# Altium PCB db.PcbDoc
Units mil, origin at the board's own origin, x right, y up, seen from the top; angles counter-clockwise.
Board outline 8515 x 5415 mil, 2 copper layers (Top Layer, Bottom Layer); 169 components, 109 nets, 459 pads, 410 vias.
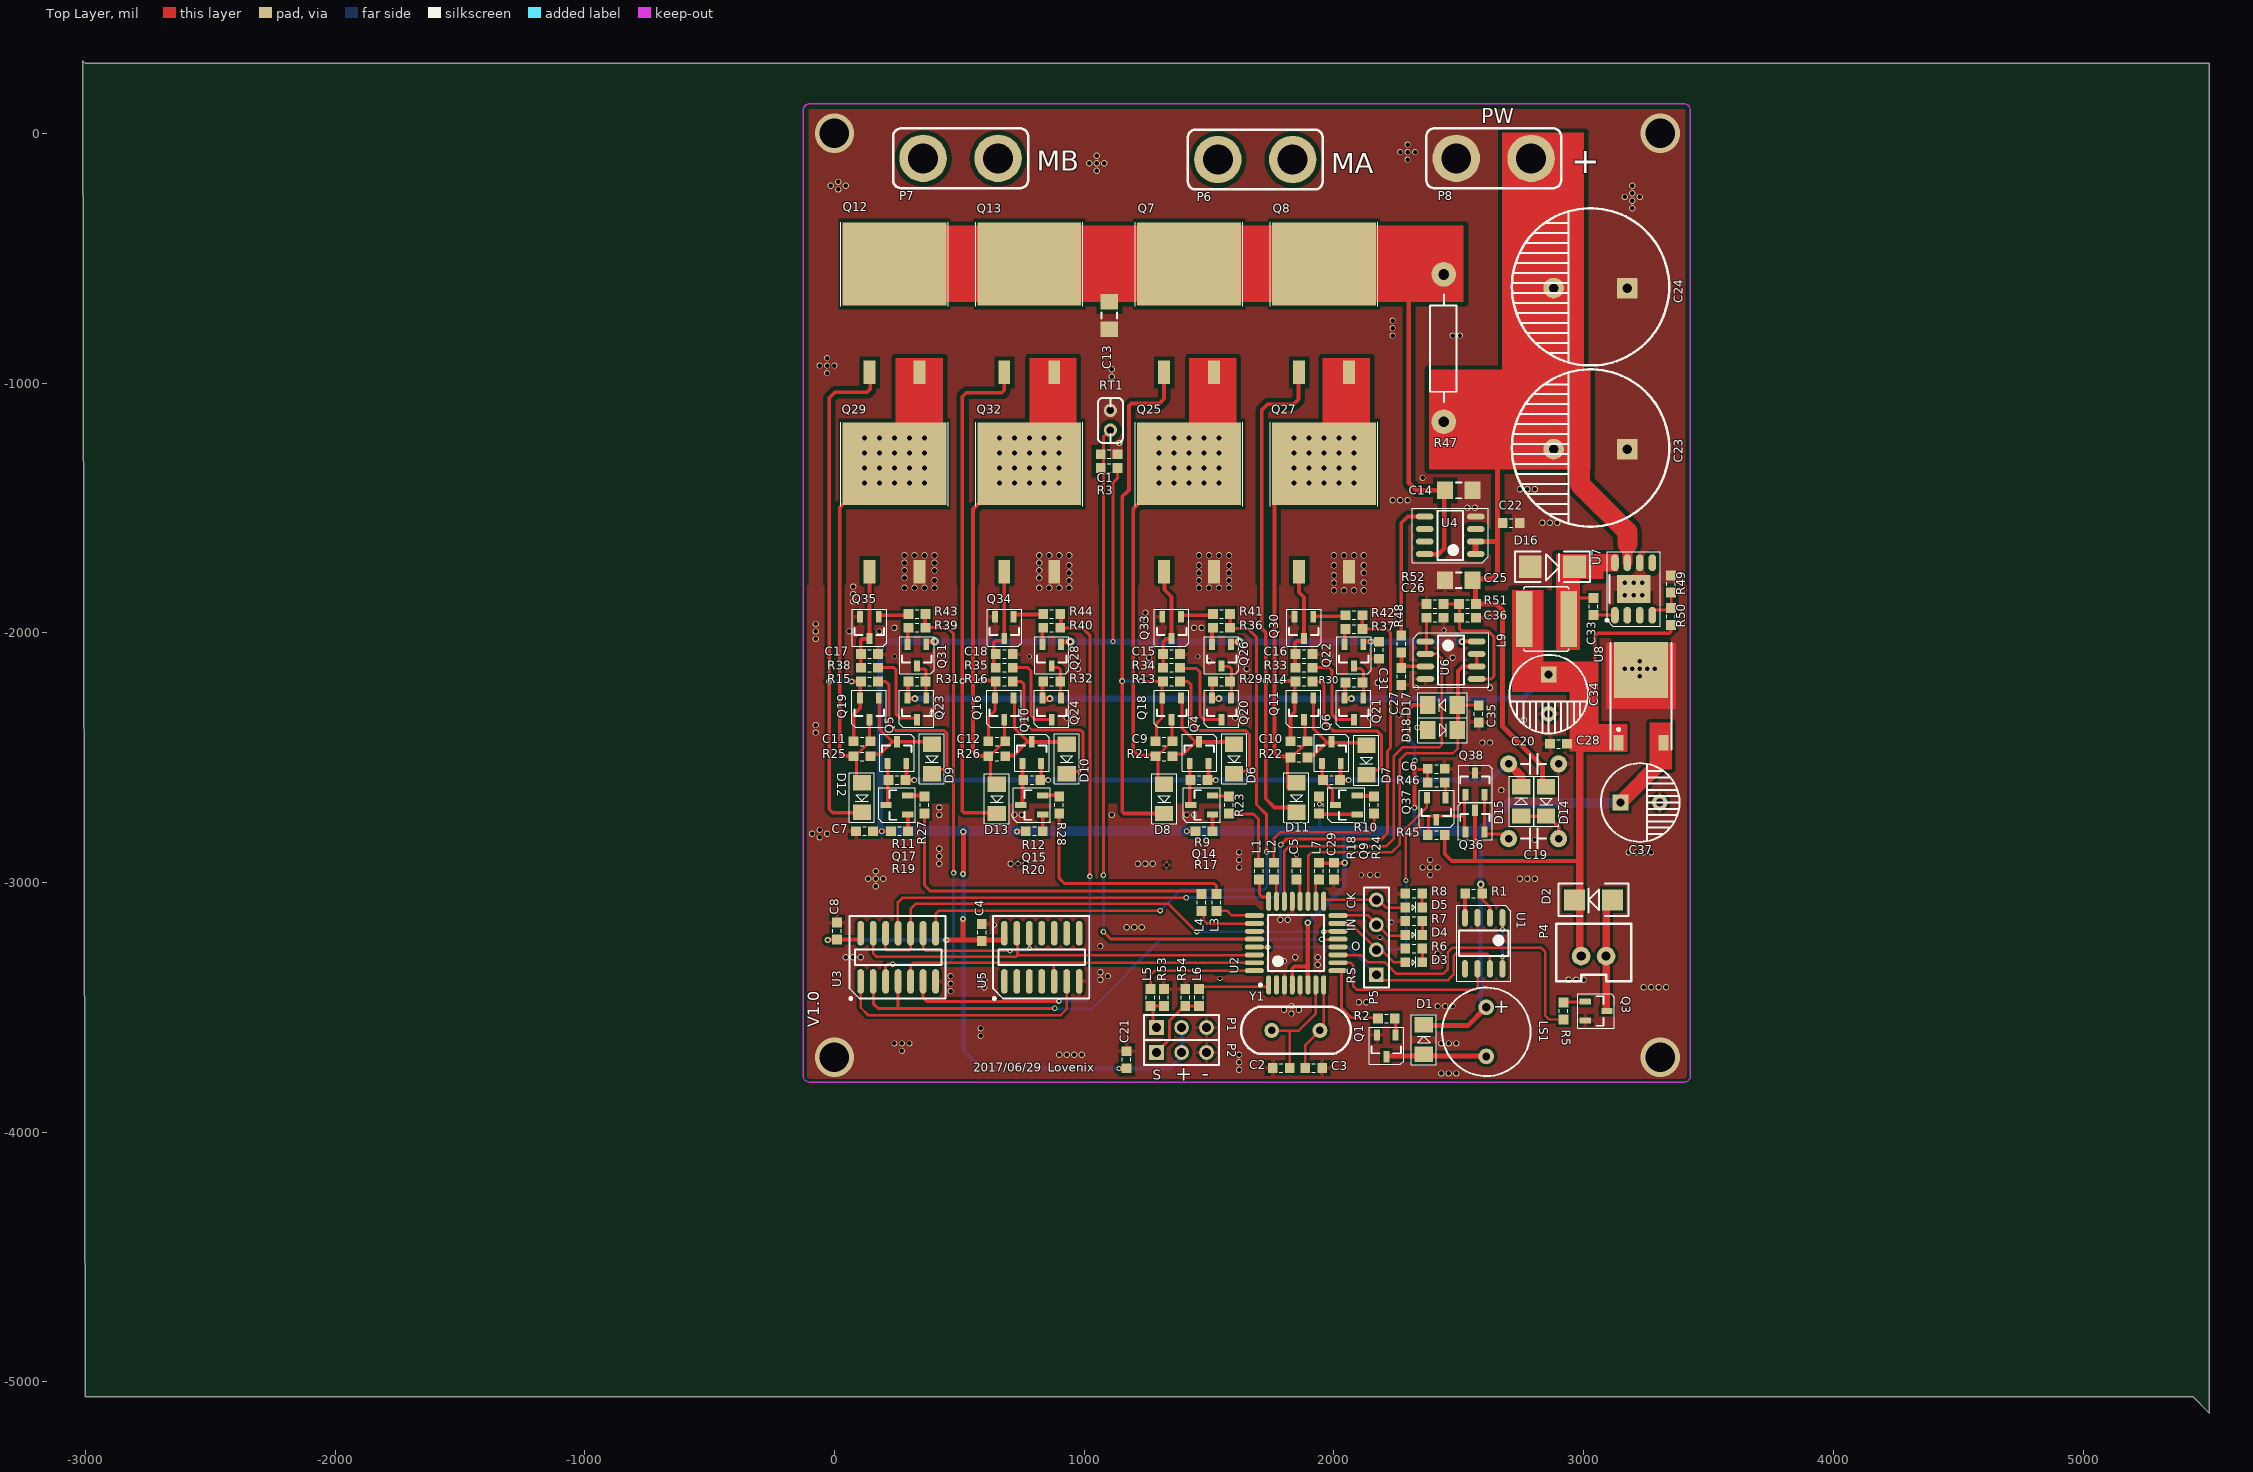
[diagram p0: Top Layer view]
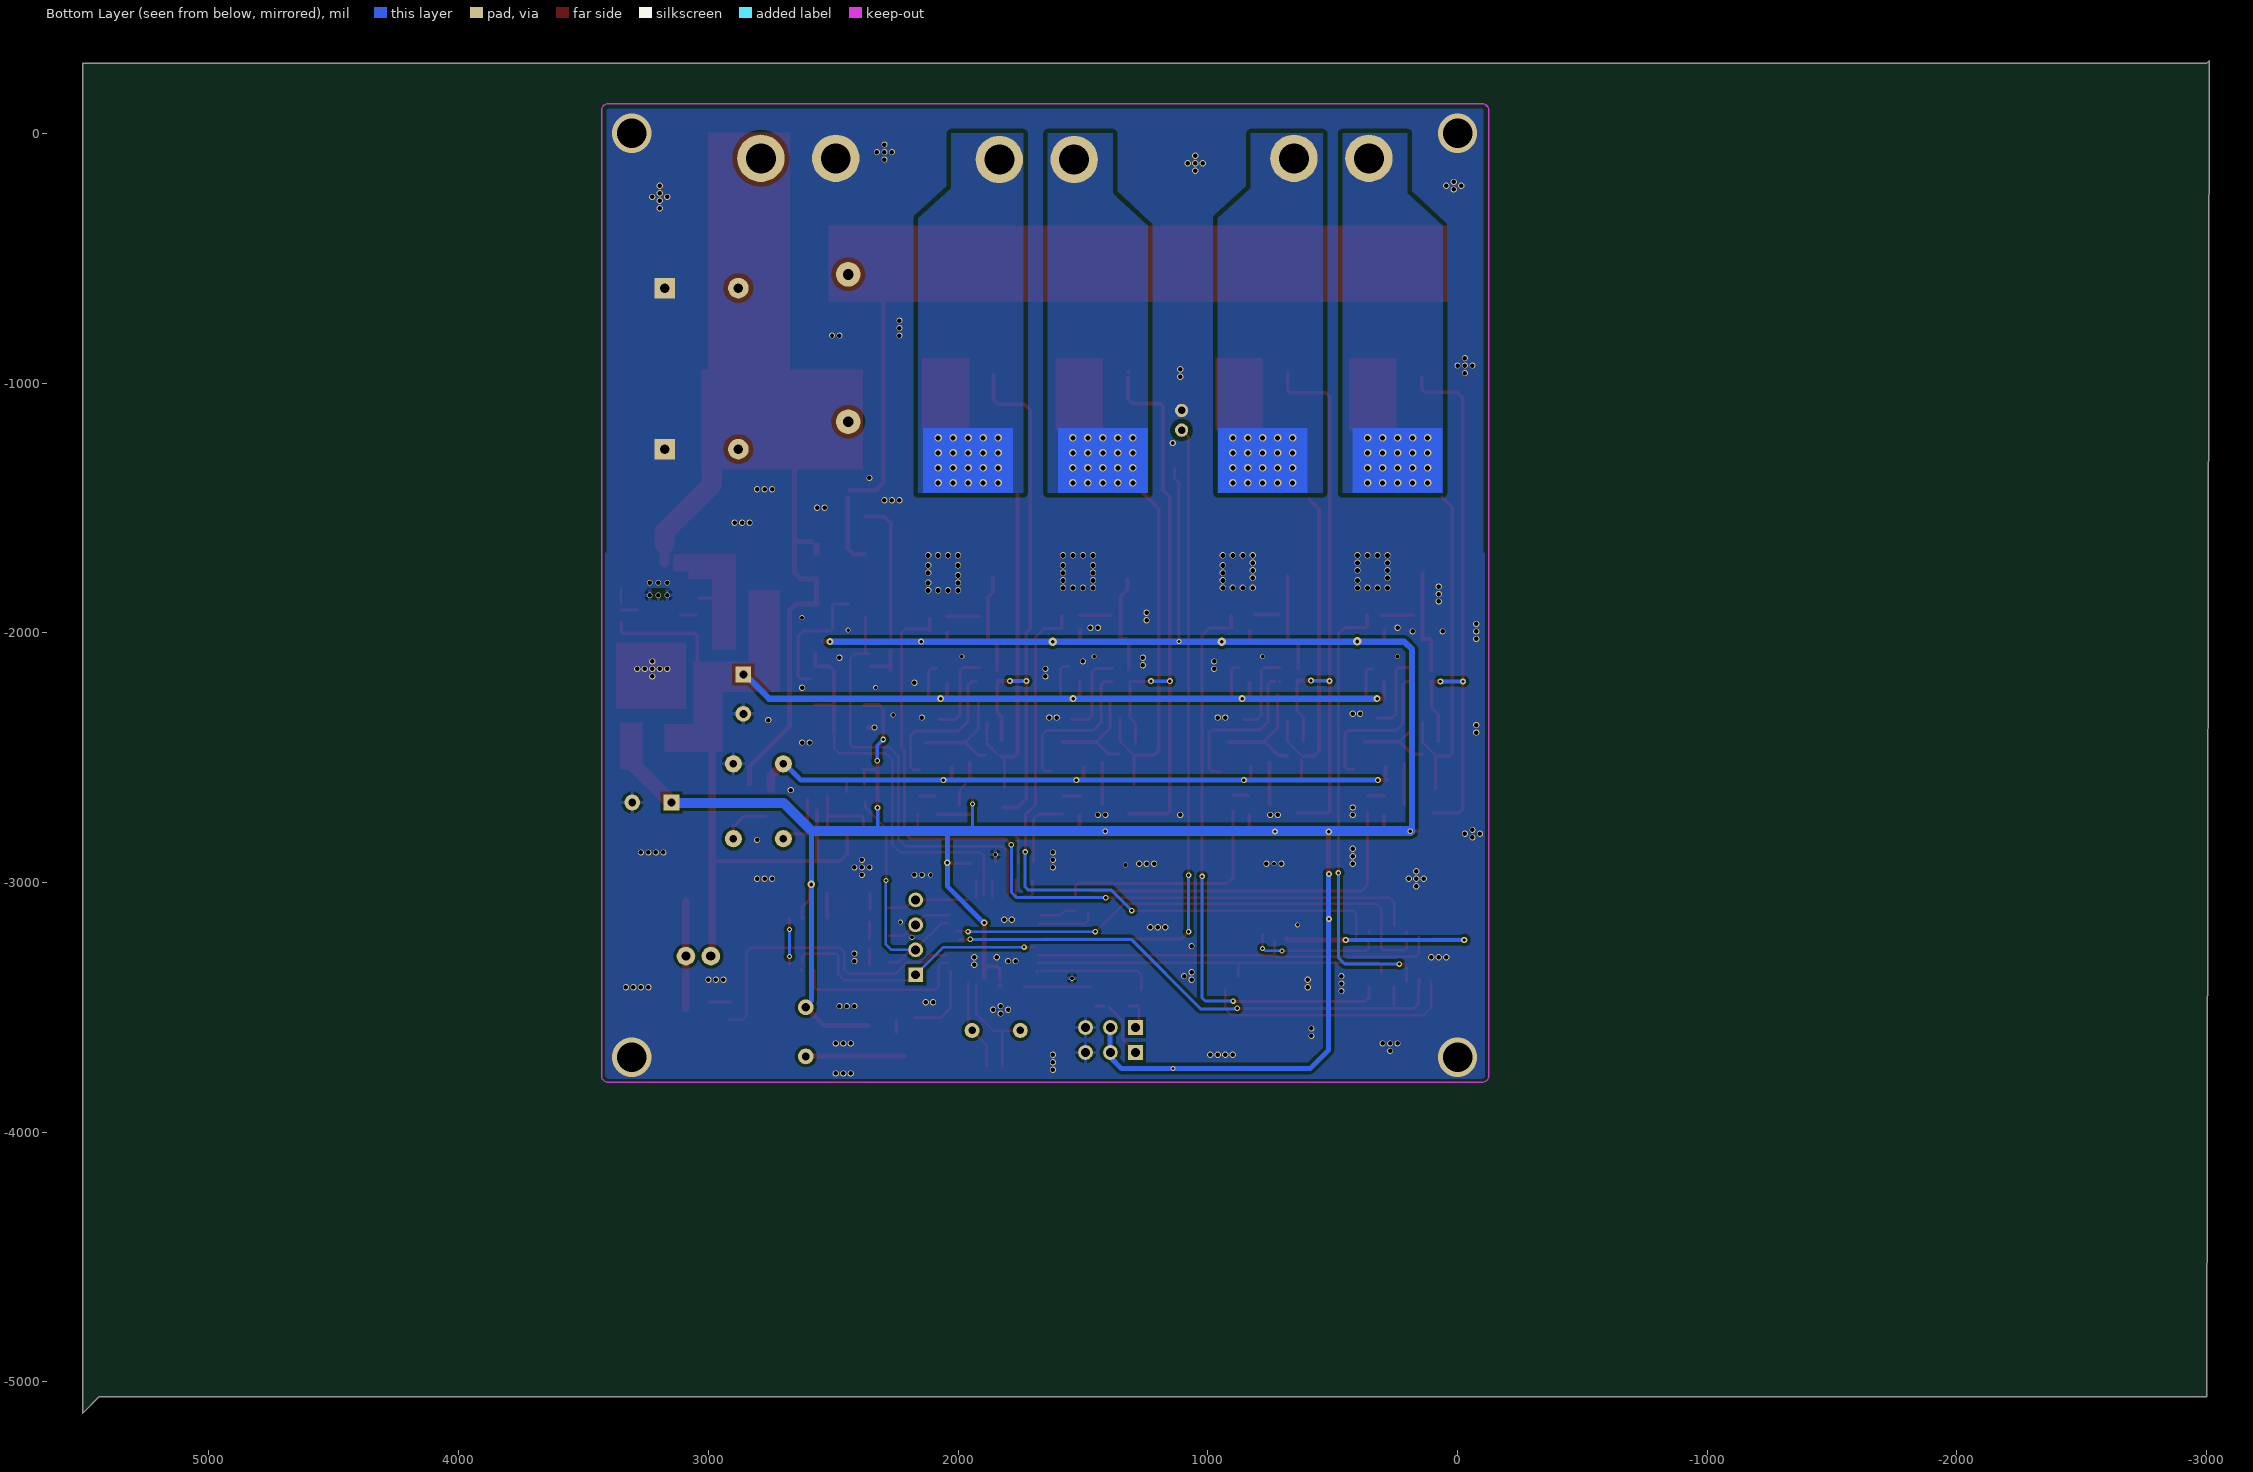
[diagram p1: Bottom Layer view, seen from below]

## Layer stack, top to bottom
Top Layer: signal copper 1.4
Dielectric: dielectric 12.6, FR-4, Dk 4.8
Bottom Layer: signal copper 1.4

## Board outline
-3010,290 -3000,280 5505,280 5505,-5125 5440,-5060 -3000,-5060

## Design rules (kind name [scope] priority, off if disabled: settings)
Clearance Clearance_1 [InPolygon] p1: gap=12
Clearance [All] p2 off: gap=12
ComponentClearance [All] p1 off: gap=10 collisioncheckmode=3 verticalgap=10
HoleSize [All] p1: absolutevalues=TRUE maxlimit=200 minlimit=1 maxpercent=80.000 minpercent=20.000
PolygonConnect [All] p1: connectstyle=Relief reliefconductorwidth=15 reliefentries=4 polygonreliefangle="90 Angle"
RoutingVias [All] p1: holewidth=18 width=29 viastyle="Through Hole" minholewidth=12 minwidth=20 maxholewidth=150 maxwidth=250
SolderMaskExpansion [All] p1: expansion=4
TestPointUsage [All] p1: valid=0 allowmultiple=FALSE
Testpoint [All] p1: side=15 testpointundercomponent=TRUE minsize=40 maxsize=100 preferedsize=60 minholesize=0 maxholesize=40 preferedholesize=32 testpointgrid=1 style=1023 order=0-112345678
Width [All] p1: maxlimit=300 minlimit=10 preferedwidth=10 toplayer_prefwidth=12 bottomlayer_prefwidth=12 minimp=50.000000 maximp=50.000000 favimp=50.000000
17 further rules are at their usual default settings.

## Classes and differential pairs
component class power: C28 C29 C30 C31 C32 C33 C34 C35 C36 C37 D16 D17 D18 D19 D24 D25 L9 L14 L18 P8 R49 R50 R51 R52 R93 R94 U7 U8 U13
component class core: C1 C2 C3 C4 C5 C6 C7 C8 D1 D2 D3 D4 D5 L1 L2 L3 L4 L5 L6 L7 LS1 P1 P2 P4 P5 Q1 Q3 R1 R2 R3 R5 R6 R7 R8 R53 R54 RT1 U1 U2 U3 U5 Y1
component class drive: C9 C10 C11 C12 C13 C14 C15 C16 C17 C18 C19 C20 C21 C22 C23 C24 C25 C26 C27 D6 D7 D8 D9 D10 D11 D12 D13 D14 D15 P6 P7 Q4 Q5 Q6 Q7 Q8 Q9 Q10 Q11 Q12 Q13 Q14 Q15 Q16 Q17 Q18 Q19 Q20 Q21 Q22 Q23 Q24 Q25 Q26 Q27 Q28 Q29 Q30 Q31 Q32 Q33 Q34 Q35 Q36 Q37 Q38 R9 R10 R11 R12 R13 R14 R15 R16 R17 R18 R19 R20 R21 R22 R23 R24 R25 R26 R27 R28 R29 R30 R31 R32 R33 R34 R35 R36 R37 R38 R39 R40 R41 R42 R43 R44 R45 R46 R47 R48 U4 U6

## Components (designator, comment, footprint, x,y, rotation, side; value= is the part's Value field where it differs from the comment)
C1 "Cap" 0603 1100,-1285 r180 top
C2 "Cap" 0603 1789,-3743 r180 top
C3 "Cap" 0603 1919,-3743 r0 top
C4 "Cap" 0603 590,-3200 r90 top
C5 "Cap" 0603 1850,-2955 r90 top
C6 "Cap" 0603 2410,-2545 r180 top
C7 "Cap" 0603 120,-2795 r0 top
C8 "Cap" 0603 10,-3195 r270 top
C9 "Cap" 0603 1320,-2435 r0 top
C10 "Cap" 0603 1860,-2435 r0 top
C11 "Cap" 0603 110,-2435 r0 top
C12 "Cap" 0603 650,-2435 r0 top
C13 "Cap" 3216[1206] 1100,-730 r270 top
C14 "Cap" 3216[1206] 2500,-1430 r0 top
C15 "Cap" 0603 1350,-2085 r0 top
C16 "Cap" 0603 1880,-2085 r0 top
C17 "Cap" 0603 140,-2085 r0 top
C18 "Cap" 0603 680,-2085 r0 top
C19 "Cap" C-5.08 2900,-2825 r180 top
C20 "Cap" C-5.08 2900,-2525 r180 top
C21 "Cap" 0603 1170,-3710 r270 top
C22 "Cap" 0603 2710,-1560 r180 top
C23 "Cap Pol1" C16-7.5 2880,-1265 r0 top
C24 "Cap Pol1" C16-7.5 2880,-620 r0 top
C25 "Cap" 3216[1206] 2500,-1790 r180 top
C26 "Cap" 0603 2405,-1940 r180 top
C27 "Cap" 0603 2270,-2175 r90 top
C28 "Cap" 0603 2900,-2445 r180 top
C29 "Cap" 0603 2000,-2955 r270 top
C31 "Cap" 0603 2180,-2070 r270 top
C33 "Cap" 0603 3040,-1895 r270 top
C34 "Cap Pol1" C8x4 2860,-2325 r90 top
C35 "Cap" 0603 2580,-2325 r90 top
C36 "Cap" 0603 2535,-1940 r0 top
C37 "Cap Pol1" C8x4 3305,-2680 r180 top
D1 "4148" LL34 2360,-3630 r90 top
D2 "Diode" SMA 3040,-3070 r180 top
D3 "FAN" 0603-LED 2320,-3320 r0 top
D4 "SIG" 0603-LED 2320,-3210 r0 top
D5 "FAT" 0603-LED 2320,-3100 r0 top
D6 "1N4148" LL34 1600,-2505 r270 top
D7 "1N4148" LL34 2130,-2510 r270 top
D8 "1N4744" LL34 1320,-2665 r270 top
D9 "1N4148" LL34 390,-2505 r270 top
D10 "1N4148" LL34 930,-2505 r270 top
D11 "1N4744" LL34 1850,-2660 r270 top
D12 "1N4744" LL34 110,-2660 r270 top
D13 "1N4744" LL34 650,-2665 r270 top
D14 "Diode" LL34 2850,-2675 r270 top
D15 "Diode" LL34 2750,-2675 r90 top
D16 "SS54" SMB 2875,-1735 r0 top
D17 "4148" LL34 2435,-2290 r180 top
D18 "4148" LL34 2435,-2390 r0 top
L1 "Inductor" 0603 1700,-2955 r90 top
L2 "Inductor" 0603 1760,-2955 r90 top
L3 "Inductor" 0603 1530,-3080 r90 top
L4 "Inductor" 0603 1470,-3080 r90 top
L5 "Inductor" 0603 1265,-3461 r90 top
L6 "Inductor" 0603 1460,-3461 r90 top
L7 "Inductor" 0603 1940,-2955 r90 top
L9 "Inductor" L-6045 2940,-1945 r180 top
LS1 "Bell" BEEP-9x5.5 2610,-3500 r270 top
P1 "S1" HDR1X3 1290,-3581 r0 top
P2 "S2" HDR1X3 1290,-3681 r0 top
P4 "FAN" XH2.54-2P 2990,-3295 r0 top
P5 "ISP" HDR1X4 2170,-3370 r90 top
P6 "L-MOT" MG7.62-2P 1835,-105 r180 top
P7 "L-MOT" MG7.62-2P 655,-100 r180 top
P8 "POW" MG7.62-2P 2790,-100 r180 top
Q1 "NPN" SOT-23-NPN 2210,-3655 r180 top
Q3 "NPN" SOT-23-NPN 3050,-3515 r270 top
Q4 "2N5401" SOT-23-PNP 1460,-2480 r0 top
Q5 "2N5401" SOT-23-PNP 250,-2480 r0 top
Q6 "2N5401" SOT-23-PNP 1990,-2480 r0 top
Q7 "IRF3205S" D2PAK-263 1420,-740 r0 top
Q8 "IRF3205S" D2PAK-263 1960,-740 r0 top
Q9 "2N5551" SOT-23-NPN 2050,-2690 r90 top
Q10 "2N5401" SOT-23-PNP 790,-2480 r0 top
Q11 "2N5401" SOT-23-PNP 1880,-2305 r180 top
Q12 "IRF3205S" D2PAK-263 240,-740 r0 top
Q13 "IRF3205S" D2PAK-263 780,-740 r0 top
Q14 "2N5551" SOT-23-NPN 1470,-2690 r90 top
Q15 "2N5551" SOT-23-NPN 790,-2690 r90 top
Q16 "2N5401" SOT-23-PNP 680,-2305 r180 top
Q17 "2N5551" SOT-23-NPN 250,-2690 r90 top
Q18 "2N5401" SOT-23-PNP 1350,-2305 r180 top
Q19 "2N5401" SOT-23-PNP 140,-2305 r180 top
Q20 "2N5401" SOT-23-PNP 1550,-2305 r180 top
Q21 "2N5401" SOT-23-PNP 2080,-2305 r180 top
Q22 "2N5551" SOT-23-NPN 2080,-2090 r180 top
Q23 "2N5401" SOT-23-PNP 330,-2305 r180 top
Q24 "2N5401" SOT-23-PNP 870,-2305 r180 top
Q25 "IRF3205S" D2PAK-263 1420,-1540 r0 top
Q26 "2N5551" SOT-23-NPN 1550,-2090 r180 top
Q27 "IRF3205S" D2PAK-263 1960,-1540 r0 top
Q28 "2N5551" SOT-23-NPN 870,-2090 r180 top
Q29 "IRF3205S" D2PAK-263 240,-1540 r0 top
Q30 "2N5551" SOT-23-NPN 1880,-1980 r180 top
Q31 "2N5551" SOT-23-NPN 330,-2090 r180 top
Q32 "IRF3205S" D2PAK-263 780,-1540 r0 top
Q33 "2N5551" SOT-23-NPN 1350,-1980 r180 top
Q34 "2N5551" SOT-23-NPN 680,-1980 r180 top
Q35 "2N5551" SOT-23-NPN 140,-1980 r180 top
Q36 "NPN" SOT-23-NPN 2565,-2755 r0 top
Q37 "NPN" SOT-23-NPN 2410,-2705 r180 top
Q38 "PNP" SOT-23-PNP 2565,-2605 r0 top
R1 "Res1" 0603 2560,-3045 r0 top
R2 "Res1" 0603 2210,-3545 r180 top
R3 "Res1" 0603 1100,-1340 r0 top
R5 "Res1" 0603 2920,-3515 r90 top
R6 "Res1" 0603 2320,-3265 r180 top
R7 "Res1" 0603 2320,-3155 r180 top
R8 "Res1" 0603 2320,-3045 r180 top
R9 "Res1" 0603 1460,-2590 r180 top
R10 "Res1" 0603 1990,-2590 r180 top
R11 "Res1" 0603 250,-2590 r180 top
R12 "Res1" 0603 790,-2590 r180 top
R13 "Res1" 0603 1350,-2195 r180 top
R14 "Res1" 0603 1880,-2195 r0 top
R15 "Res1" 0603 140,-2195 r180 top
R16 "Res1" 0603 680,-2195 r0 top
R17 "Res1" 0603 1480,-2795 r180 top
R18 "Res1" 0603 1940,-2690 r90 top
R19 "Res1" 0603 260,-2795 r180 top
R20 "Res1" 0603 800,-2795 r180 top
R21 "Res1" 0603 1320,-2495 r0 top
R22 "Res1" 0603 1860,-2500 r0 top
R23 "Res1" 0603 1580,-2690 r90 top
R24 "Res1" 0603 2160,-2690 r270 top
R25 "Res1" 0603 110,-2495 r0 top
R26 "Res1" 0603 650,-2495 r0 top
R27 "Res1" 0603 360,-2690 r90 top
R28 "Res1" 0603 900,-2690 r270 top
R29 "Res1" 0603 1550,-2195 r0 top
R30 "Res1" 0603 2080,-2200 r0 top
R31 "Res1" 0603 330,-2195 r0 top
R32 "Res1" 0603 870,-2195 r0 top
R33 "Res1" 0603 1880,-2140 r0 top
R34 "Res1" 0603 1350,-2140 r180 top
R35 "Res1" 0603 680,-2140 r0 top
R36 "Res1" 0603 1550,-1980 r180 top
R37 "Res1" 0603 2080,-1985 r0 top
R38 "Res1" 0603 140,-2140 r180 top
R39 "Res1" 0603 330,-1980 r180 top
R40 "Res1" 0603 870,-1980 r0 top
R41 "Res1" 0603 1550,-1925 r0 top
R42 "Res1" 0603 2080,-1930 r180 top
R43 "Res1" 0603 330,-1925 r0 top
R44 "Res1" 0603 870,-1925 r180 top
R45 "Res1" 0603 2410,-2810 r0 top
R46 "Res1" 0603 2410,-2600 r180 top
R47 "" R15-1mm 2440,-660 r270 top
R48 "Res1" 0603 2270,-2045 r90 top
R49 "Res1" 0603 3350,-1805 r270 top
R50 "Res1" 0603 3350,-1935 r90 top
R51 "Res1" 0603 2535,-1885 r0 top
R52 "Res1" 0603 2405,-1885 r0 top
R53 "Res1" 0603 1320,-3461 r90 top
R54 "Res1" 0603 1405,-3461 r90 top
RT1 "Res1" RT-2.0 1105,-1110 r270 top
U1 "MAX706RCSA" SOIC8 2600,-3245 r270 top
U2 "ATmega8-16AC" 32A_M 1849,-3243 r90 top
U3 "IC" 751A 255,-3300 r90 top
U4 "MAX4080" SOIC8 2465,-1610 r180 top
U5 "IC" 751A 830,-3300 r90 top
U6 "LM358D" SOIC8 2470,-2110 r0 top
U7 "LM22676-5.0" SOP8-POW 3200,-1825 r90 top
U8 "MC78M05" 369A-13 3230,-2295 r0 top
Y1 "XTAL" 49SD 1944,-3593 r180 top

## Footprints (in the part's own frame and the unit in brackets; to place one, negate y for a bottom-side part, rotate by r counter-clockwise, add the part's x,y. Pads: shape width x height; smd on the part's side, far side on the other; paste and mask are expansions set on the pad)
32A_M [mm] "32-Pin Thin Quad Flat Pack 0.8 mm Pitch, IPC Low Density"
  oval 1.95x0.508 smd: 1(-4.25,2.8) 2(-4.25,2) 3(-4.25,1.2) 4(-4.25,0.4) 5(-4.25,-0.4) 6(-4.25,-1.2) 7(-4.25,-2) 8(-4.25,-2.8) 17(4.25,-2.8) 18(4.25,-2) 19(4.25,-1.2) 20(4.25,-0.4) 21(4.25,0.4) 22(4.25,1.2) 23(4.25,2) 24(4.25,2.8)
  oval 0.508x1.95 smd: 9(-2.8,-4.25) 10(-2,-4.25) 11(-1.2,-4.25) 12(-0.4,-4.25) 13(0.4,-4.25) 14(1.2,-4.25) 15(2,-4.25) 16(2.8,-4.25) 25(2.8,4.25) 26(2,4.25) 27(1.2,4.25) 28(0.4,4.25) 29(-0.4,4.25) 30(-1.2,4.25) 31(-2,4.25) 32(-2.8,4.25)
  silkscreen extent -4.37,-2.85 2.85,3.77, body extent -3.5,-3.5 3.5,3.5, height 1.2
49SD [mil]
  round 60 hole 30: 1(0,0) 2(193,0)
  silkscreen extent -124,-95 315,94
369A-13 [mm] "D-PAK/TO-252-AA; 3 Leads (1 Cropped); Body 10.3 (inc. leads) x 6.7 mm (LxW max)"
  rect 1x1.6 smd: 1(-2.285,-3.7) 3(2.285,-3.7)
  rect 5.5x5.7 smd: 4(0,3.7)
  silkscreen extent -3.09,-4.4 3.09,6.45
0603 [mm]
  rect 1x1 smd: 1(-0.864,0) 2(0.864,0)
  silkscreen extent -0.18,-0.43 0.18,0.43
0603-LED [mm]
  rect 1x1 smd: 1(-0.864,0) 2(0.864,0)
  silkscreen extent -0.18,-0.51 0.18,0.56
751A [mm]
  oval 2.5x0.7 smd: 1(-2.45,3.81) 2(-2.45,2.54) 3(-2.45,1.27) 4(-2.45,0) 5(-2.45,-1.27) 6(-2.45,-2.54) 7(-2.45,-3.81) 8(2.45,-3.81) 9(2.45,-2.54) 10(2.45,-1.27) 11(2.45,0) 12(2.45,1.27) 13(2.45,2.54) 14(2.45,3.81)
  silkscreen extent -4.31,-4.83 4.19,4.95, body extent -2,-4.38 2,4.38, height 1.75
3216[1206] [mm] "Chip Resistor; Body 3.2 x 1.6 mm (LxW typ)"
  rect 1.6x1.8 smd: 1(-1.4,0) 2(1.4,0)
  silkscreen extent -0.3,-0.8 0.3,0.8
BEEP-9x5.5 [mm]
  round 1.6 hole 0.8: 1(5,0)
  round 1.6 hole 0.9: 2(0,0)
  silkscreen extent -2,-4.5 7,4.5
C8x4 [mm]
  round 1.6 hole 0.8: 1(0,0)
  rect 1.6x1.6 hole 0.8: 2(4,0)
  silkscreen extent -2,-4 6,4
C16-7.5 [mm]
  round 2.1 hole 0.95: 1(0,0)
  rect 2.1x2.1 hole 0.95: 2(7.5,0)
  silkscreen extent -4.25,-7.87 11.75,8.12
C-5.08 [mm]
  round 1.75 hole 0.75: 1(0,0) 2(5.08,0)
  silkscreen extent 1.27,-1.02 3.81,1.02
D2PAK-263 [mm]
  rect 1.2x2.4 smd: 1(-2.54,-5.5) 3(2.54,-5.5)
  rect 10.55x8.4 smd: 2(0,5.5)
  silkscreen extent -5.46,1.19 5.46,9.73
HDR1X3 [mm] "Connector; Header; 3 Position"
  rect 1.5x1.5 hole 0.9: 1(0,0)
  round 1.5 hole 0.9: 2(2.54,0) 3(5.08,0)
  silkscreen extent -1.27,-1.27 6.35,1.27
HDR1X4 [mm] "Connector; Header; 4 Position"
  rect 1.5x1.5 hole 0.9: 1(0,0)
  round 1.5 hole 0.9: 2(2.54,0) 3(5.08,0) 4(7.62,0)
  silkscreen extent -1.27,-1.27 8.89,1.27
L-6045 [mm]
  rect 1.7x5.7 smd: 1(0,0) 2(4.5,0)
  silkscreen extent 0,-3.3 4.57,3.3
LL34 [mm] "MELF Diode, 2-Leads, Body 3.3x1.6mm, IPC Medium Density"
  rect 1.575x1.85 smd: 1(-1.5,0) 2(1.5,0)
  silkscreen extent -2.54,-1.27 2.54,1.27, body extent -1.65,-0.82 1.65,0.82, height 1.65
MG7.62-2P [mil]
  round 190 hole 120: 1(0,0) 2(300,0)
  silkscreen extent -120,-120 420,120
R15-1mm [mm]
  round 2.5 hole 1.1: 1(-2.413,0) 2(12.573,0)
  silkscreen extent -0.38,-1.4 10.55,1.3
RT-2.0 [mm]
  round 1.35 hole 0.762: 1(0,0) 2(2,0)
  silkscreen extent -1.27,-1.27 3.3,1.27
SMA [mm] "Molded Diode, 2-Leads, Body 4.3x2.7mm, IPC Medium Density"
  rect 2.15x2.15 smd: 1(-1.93,0) 2(1.93,0)
  silkscreen extent -3.56,-1.65 3.56,1.65, body extent -2.28,-1.42 2.29,1.42, height 2.95
SMB [mm]
  rect 2.3x2.3 smd: 1(-2.25,-0.025) 2(2.25,-0.025)
  silkscreen extent -3.8,-1.58 3.81,1.52
SOIC8 [mm]
  oval 1.8x0.6 smd: 1(-2.625,1.905) 2(-2.625,0.635) 3(-2.625,-0.635) 4(-2.625,-1.905) 5(2.575,-1.905) 6(2.575,-0.635) 7(2.575,0.635) 8(2.575,1.905)
  silkscreen extent -3.89,-2.74 3.84,2.77, body extent -2.03,-2.5 1.97,2.5, height 1.76
SOP8-POW [mm]
  oval 1.7x0.8 smd: 1(-2.675,1.905) 2(-2.675,0.635) 3(-2.675,-0.635) 4(-2.675,-1.905) 5(2.675,-1.905) 6(2.675,-0.635) 7(2.675,0.635) 8(2.675,1.905)
  rect 2.8x3.4 smd: 6(0,0)
  silkscreen extent -3.78,-2.7 3.77,2.82
SOT-23-NPN [mm]
  rect 0.6x1.143 smd: 1(0.95,-1.108) 2(-0.95,-1.108) 3(0,1.108)
  silkscreen extent -1.75,-1.89 1.75,1.87, body extent -1.5,-0.66 1.5,0.74, height 1.1
SOT-23-PNP [mm]
  rect 0.6x1.143 smd: 1(0.95,-1.108) 2(-0.95,-1.108) 3(0,1.108)
  silkscreen extent -1.73,-1.89 1.78,1.87, body extent -1.5,-0.66 1.5,0.74, height 1.1
XH2.54-2P [mm]
  round 1.9 hole 0.95 paste+0: 1(0,0)
  round 1.9 hole 0.95: 2(2.54,0)
  silkscreen extent -2.54,-2.54 5.08,3.3

## Part data
C1 C2 C3 C4 C5 C6 C7 C8 C9 C10 C11 C12 C13 C14 C15 C16 C17 C18 C19 C20 C21 C22 C25 C26 C27 C28 C29 C31 C33 C35 C36: "Capacitor"
C23 C24 C34 C37: "Polarized Capacitor (Radial)"
D1 D2: library part "Diode 1N4007", "1 Amp General Purpose Rectifier"
D3 D4 D5: library part LED2, "Typical RED, GREEN, YELLOW, AMBER GaAs LED"
D6 D7 D9 D10: library part "Diode 1N4148", "High Conductance Fast Diode"
D8 D11 D12 D13: library part "D Zener", "Zener Diode"
D14 D15 D16 D17 D18: library part "Diode 1N5408", "3 Amp Medium Power Silicon Rectifier Diode"
LS1: "Electrical Bell"
P1 P2: library part "Header 3", "Header, 3-Pin"
P4 P6 P7 P8: library part "Header 2", "Header, 2-Pin"
P5: library part "Header 5", "Header, 5-Pin"
Q1 Q3 Q36 Q37: library part 2N5551, "NPN General Purpose Amplifier"
Q4 Q5 Q6 Q10 Q11 Q16 Q18 Q19 Q20 Q21 Q23 Q24: "PNP General Purpose Amplifier"
Q7 Q8 Q12 Q13 Q25 Q27 Q29 Q32: "HEXFET Power MOSFET"
Q9 Q14 Q15 Q17 Q22 Q26 Q28 Q30 Q31 Q33 Q34 Q35: "NPN General Purpose Amplifier"
Q38: library part 2N5401, "PNP General Purpose Amplifier"
R1 R2 R3 R5 R6 R7 R8 R9 R10 R11 R12 R13 R14 R15 R16 R17 R18 R19 R20 R21 R22 R23 R24 R25 R26 R27 R28 R29 R30 R31 R32 R33 R34 R35 R36 R37 R38 R39 R40 R41 R42 R43 R44 R45 R46 R48 R49 R50 R51 R52 R53 R54 RT1: "Resistor"
R47: library part Res1, "Resistor"
U1: "+3V Voltage Monitoring, Low-Cost, µP Supervisory Circuit"
U2: "8-Bit AVR Microcontroller with 8K Bytes of In-System Programmable Flash Memory"
U3: library part MC74HC08AD, "Quad 2-Input AND Gate"
U5: library part MC74HC04AD, "Hex Inverter"
U6: "Dual Low-Power Operational Amplifier"
U8: library part MC78M05BDTRK, "Three-Terminal Medium Current Positive Voltage Regulator"
Y1: "Crystal Oscillator"

## Via types
v1: diameter 25, hole 18, Top Layer to Bottom Layer, 188 vias
v2: diameter 30, hole 20, Top Layer to Bottom Layer, 80 vias
v3: diameter 25, hole 20, Top Layer to Bottom Layer, 56 vias
v4: diameter 20, hole 15, Top Layer to Bottom Layer, 16 vias
v5: diameter 22, hole 13, Top Layer to Bottom Layer, 15 vias
v6: diameter 24, hole 13, Top Layer to Bottom Layer, 9 vias
v7: diameter 20, hole 12, Top Layer to Bottom Layer, 8 vias
v8: diameter 23, hole 13, Top Layer to Bottom Layer, 6 vias
v9: diameter 22, hole 18, Top Layer to Bottom Layer, 6 vias
v10: diameter 25, hole 13, Top Layer to Bottom Layer, 5 vias
v11: diameter 28, hole 14, Top Layer to Bottom Layer, 5 vias
v12: diameter 24, hole 14, Top Layer to Bottom Layer, 4 vias
v13: diameter 157.48, hole 118.11, Top Layer to Bottom Layer, 4 vias
v14: diameter 34, hole 15, Top Layer to Bottom Layer, 3 vias
v15: diameter 25, hole 15, Top Layer to Bottom Layer, 2 vias
v16: diameter 26, hole 14, Top Layer to Bottom Layer, 2 vias
v17: diameter 30, hole 15, Top Layer to Bottom Layer, 1 vias

## Nets (pads, with @x,y where several pads share a name; then routed paths per layer and width w, separated by ;. In a path a pad name is that pad's centre, name@x,y a point inside that pad or via, vN(x,y) a via of type N, cw(c..) or ccw(c..) an arc to the next point about the centre after c; other vN are vias at no path point)
+5V: C4.1 C6.2 C7.2 C8.2 C21.2 C29.1 C31.1 C37.2 D1.2 D17.2 L7.2 LS1.2 P1.2 P2.2 Q22.2 Q26.2 Q28.2 Q31.2 R1.2 R3.2 R17.2 R18.2 R19.2 R20.2 R46.2 U1.2 U2.4 U2.6 U3.14 U5.14 U6.8 U8.3 | length 12960.2
  Top Layer w12: v7(1116,-2036) 1116,-1398 1134,-1380 R3.2 ; v7@1943,-2687 R18.2@1943,-2661 ; 2324,-2547 C6.2@2380,-2547 ; R46.2@2374.69,-2605.7 R46.2@2376,-2606 ; R46.2@2375,-2607 C6.2@2375,-2551 ; R1.2@2596,-3040 2596,-3070 2625,-3099 U1.2@2625,-3136
  Top Layer w15: v10(-27,-3231) -27,-3229 U3.14@100,-3229 ; C7.2@155,-2795 R19.2@220,-2795 ; v8(731,-2796) 765,-2796 R20.2 ; v8(1411,-2795) R17.2@1443,-2795 ; v8@1412,-2796 v8@1412,-2795 ; U2.4@1833,-3414 U2.4@1833.02,-3410.32 ; U2.4@1833.25,-3388 1833.25,-3344.75 1841,-3337 1889,-3337 ; L7.2@1950,-2923 v16@2044,-2923 ; v8@2300,-2430 2300,-2307 2317,-2290 D17.2 ; v8(2323,-2701) v8@2323,-2513
  Top Layer w18: Q31.2@368,-2036 v14@398,-2036 ; Q28.2@915,-2036 v14@945,-2036 ; Q26.2@1592,-2037 v14@1622,-2037 ; U2.6@1896,-3384 v16@1896,-3162 ; Q22.2@2125,-2036 C31.1@2168,-2036 ; v11@2515,-2035 U6.8@2545,-2035
  Top Layer w20: v10@450,-3231 680,-3231 U5.14@684,-3227 ; 515,-3227 v10(515,-3147) ; v10@516,-2966 v10(516,-2797) ; v7(1139,-3745) C21.2@1168,-3745 ; U2.4@1833,-3412 U2.4@1833.01,-3410.32 ; D1.2@2360,-3574 2536,-3574 LS1.2@2609,-3501 ; R1.2@2589,-3045 v17@2589,-3008 ; U1.2@2624,-3142 U1.2@2624.01,-3141.61
  Top Layer w60: C37.2@3145,-2683 3319.96,-2508.04
  Bottom Layer w12: 1943,-2783 v7@1943,-2687
  Bottom Layer w15: v10(-27,-3231) v10@446,-3231 ; v8@2301,-2429 2324,-2452 v8@2324,-2512 ; 2322,-2781 v8@2322,-2702
  Bottom Layer w20: v10@516,-2968 516,-3671 590,-3745 1346,-3745 1392,-3699 P1.2@1392,-3585 ; v16@1895,-3159 1900,-3159 2043,-3016 2043,-2796 ; 2588,-2799 2588,-3472 LS1.2@2610,-3494
  Bottom Layer w25: v8@182,-2792 182,-2067 213,-2036 v11(2513,-2036)
  Bottom Layer w40: v8@189,-2794 2586,-2794 2699,-2681 C37.2@3147.52,-2681
  other v6: 2148,-2036
  other v7: 1943,-2686
  other v8: 189,-2795 2324,-2513 2300,-2428
  other v10: 448,-3231 515,-2966
  other v14: 944,-2036 1621,-2036 401,-2035
  other v16: 1895,-3161 2043,-2922
  other v17: 2588,-3008
+12V: C28.1 C34.2 D2.2 L9.2 P4.1 Q20.1 Q21.1 Q23.1 Q24.1 Q36.3 R29.1 R30.1 R31.1 R32.1 R45.2 R50.1 U8.1 | length 5262.2
  Top Layer w15: Q23.1@294,-2263 R31.1@294,-2199 ; Q24.1@833,-2264 R32.1@833,-2200 ; Q20.1@1513,-2261 R29.1@1513,-2197 ; Q21.1@2044,-2267 R30.1@2044,-2203 ; R45.2@2443,-2806 2443.1,-2809.13 R45.2@2443.13,-2810.03 ; R45.2@2444,-2813 2444,-2886 2472,-2914 2985,-2914 ; R45.2@2446.85,-2810.32 R45.2@2447,-2809 ; 2565,-2911 Q36.3 ; 3045,-2313 3045,-2014 3057,-2002 3342,-2002 3349,-1995 R50.1@3349,-1960
  Top Layer w18: Q23.1@294,-2264 v11@324,-2264 ; Q20.1@1511,-2264 v11@1541,-2264 ; Q21.1@2041,-2264 v11@2071,-2264
  Top Layer w25: Q24.1@835.24,-2264 v11@864,-2264
  Top Layer w30: P4.1@2985,-3296 2985,-2457
  Bottom Layer w25: v11@323,-2264 2757,-2264 2851,-2170 C34.2@2856,-2170
  other v11: 322,-2264 863,-2264 1539,-2264 2070,-2264
AD1H: L1.2 R23.1 | length 297.3
  Top Layer w12: R23.1@1582,-2726 1678,-2726 1698,-2746 L1.2@1698,-2919
AD1L: R36.1 R41.2 U3.8 | length 2645
  Top Layer w10: U3.8@405,-3218 405,-3127 419,-3113 v5@1304.5,-3113
  Top Layer w12: R36.1@1584,-1983 1655,-1983 1690,-2018 1690,-2688 1731,-2729 v5@1731,-2877
  Top Layer w15: R36.1@1585,-1978 R41.2@1585,-1932.24
  Bottom Layer w12: v5(1304.5,-3112.5) 1386,-3031 1718,-3031 1733,-3016 v5@1733,-2878
  other v5: 1731,-2878
AD2H: L2.2 R24.2 | length 571
  Top Layer w10: L2.2 1760,-2824 1785,-2799 2146,-2799 2162,-2783 R24.2@2162,-2728
AD2L: R37.2 R42.1 U3.11 | length 3248
  Top Layer w10: U3.11@254,-3172 254,-3080 272,-3062 v5@1408,-3062
  Top Layer w12: v5(1787,-2849) 1809,-2827 2190,-2827 2215,-2802 2215,-2474 2227,-2462 2227,-2001 2211,-1985 R37.2@2111,-1985
  Top Layer w15: R37.2@2114,-1989.76 R42.1@2114,-1944
  Bottom Layer w12: v5@1411,-3061 1765,-3061 1786,-3040 v5@1786,-2851
  other v5: 1409,-3061
BD1H: L4.2 R27.1 | length 1404.1
  Top Layer w12: R27.1@361,-2720 361,-3012 383,-3034 L4.2@1464,-3034
BD1L: R39.1 R43.2 U3.3 | length 1810.2
  Top Layer w12: U3.3 205,-3335 214,-3326 v5@234,-3326 ; R39.1@366,-1980 453,-1980 477,-2004 v5@477,-2961
  Top Layer w15: R39.1@362.24,-1974 R43.2@362.24,-1928.24
  Bottom Layer w12: v5@234,-3327 452,-3327 477,-3302 v5@477,-2963
  other v5: 233,-3327 477,-2962
BD2H: L3.2 R28.2 | length 953
  Top Layer w12: R28.2@900,-2714 900,-2983 921,-3004 1521,-3004 1529,-3012 L3.2@1529,-3055
BD2L: R40.2 R44.1 U3.6 | length 2356
  Top Layer w12: U3.6@355,-3415 355,-3463 368,-3476 v5@900,-3476 ; R40.2@902,-1982 994,-1982 1024,-2012 v5@1024,-2975
  Top Layer w15: R40.2@907,-1977.76 R44.1@907,-1932
  Bottom Layer w12: v5@900,-3475 1010,-3475 1023,-3462 v5(1023,-2976)
  other v5: 899,-3475
BEEP: R2.2 U2.9 | length 306.7
  Top Layer w12: U2.9@2031,-3356 2031,-3504 2069,-3542 R2.2@2174,-3542
CSA: C26.2 U2.22 U6.1 U6.2 | length 1759.8
  Top Layer w10: U2.22@1802,-3056 1802,-2875 1821,-2856 2209,-2856 2239,-2826 2239,-2495 2275,-2459 2422,-2459 2432,-2449 2432,-2103 2413,-2084 U6.2@2354,-2084
  Top Layer w12: U6.2@2371,-2083 C26.2@2371,-1936.4
DGND: C1.1 C2.2 C3.2 C4.2 C5.2 C6.1 C7.1 C8.1 C13.2 C14.2 C15.2 C16.2 C17.2 C18.2 C20.1 C21.1 C22.1 C23.2 C24.2 C25.2 C26.1 C27.1 C28.2 C29.2 C31.2 C34.1 C35.1 C36.2 C37.1 D16.1 D18.1 P1.3 P2.3 P8.2 Q1.1 Q3.1 Q25.3 Q27.3 Q29.3 Q30.1 Q32.3 Q33.1 Q34.1 Q35.1 Q38.3 R6.2 R7.2 R8.2 R49.1 R52.1 R53.2 R54.2 RT1.1 U1.3 U2.3 U2.5 U2.21 U3.7 U4.4 U5.7 U6.4 U7.6 U8.4 | length 57
  Top Layer w12: C5.2@1851,-2920 v4(1851,-2888)
  Top Layer w20: v15(2335,-2380) D18.1@2360,-2380
  other v1: 2430,-3765 2460,-3765 2490,-3765 1620,-3750 1620,-3720 900,-3690 930,-3690 960,-3690 990,-3690 1620,-3690 270,-3675 240,-3645 270,-3645 300,-3645 2430,-3645 2460,-3645 2490,-3645 585,-3615 585,-3585 1830,-3525 1800,-3510 1860,-3510 1830,-3495 2415,-3495 2445,-3495 2475,-3495 2100,-3480 2130,-3480 465,-3435 600,-3420 3240,-3420 3270,-3420 3300,-3420 3330,-3420 465,-3405 600,-3390 1065,-3390 2940,-3390 2970,-3390 3000,-3390 465,-3375 1095,-3375 1065,-3360 1935,-3330 1770,-3315 1800,-3315 2415,-3315 45,-3300 75,-3300 105,-3300 1845,-3300 1935,-3300 2415,-3285 1065,-3255 1170,-3180 1200,-3180 1230,-3180 1785,-3150 1815,-3150 165,-3015 135,-2985 165,-2985 195,-2985 2745,-2985 2775,-2985 2805,-2985 2145,-2970 2175,-2970 2385,-2970 165,-2955 1620,-2940 2355,-2940 2385,-2940 2415,-2940 420,-2925 705,-2925 765,-2925 1215,-2925 1245,-2925 1275,-2925 1620,-2910 2385,-2910 420,-2895 1620,-2880 3180,-2880 3210,-2880 3240,-2880 3270,-2880 420,-2865 2805,-2830 -60,-2820 -90,-2805 -30,-2805 -60,-2790 420,-2730 720,-2730 750,-2730 1110,-2730 1410,-2730 1440,-2730 420,-2700 2670,-2630 2595,-2440 2625,-2440 -75,-2400 -75,-2370 2760,-2350 930,-2340 960,-2340 1605,-2340 1635,-2340 2145,-2340 390,-2325 420,-2325 2625,-2220 2175,-2200 1650,-2175 3225,-2175 975,-2145 1650,-2145 3165,-2145 3195,-2145 3225,-2145 3255,-2145 3285,-2145 1260,-2130 975,-2115 1500,-2115 3225,-2115 1260,-2100 2475,-2100 -75,-2025 -75,-1995 60,-1995 180,-1995 240,-1980 1440,-1980 1470,-1980 -75,-1965 1245,-1950 1245,-1920 75,-1875 75,-1845 75,-1815 2835,-1560 2865,-1560 2895,-1560 2535,-1500 2565,-1500 2235,-1470 2265,-1470 2295,-1470 2745,-1425 2775,-1425 2805,-1425 2355,-1380 1110,-975 -30,-960 1110,-945 -60,-930 -30,-930 0,-930 -30,-900 2235,-810 2475,-810 2505,-810 2235,-780 2235,-750 3195,-300 3195,-270 3165,-255 3225,-255 3195,-240 15,-225 -15,-210 45,-210 3195,-210 15,-195 1050,-150 1020,-120 1050,-120 1080,-120 2295,-105 1050,-90 2265,-75 2295,-75 2325,-75 2295,-45
  other v3: 2000,-1830 2040,-1830 2080,-1830 2120,-1830 280,-1820 320,-1820 360,-1820 400,-1820 820,-1820 860,-1820 900,-1820 940,-1820 1460,-1820 1500,-1820 1540,-1820 1580,-1820 2000,-1800 2120,-1800 400,-1790 940,-1790 1460,-1790 1580,-1790 280,-1780 820,-1780 2000,-1770 940,-1760 1460,-1760 1580,-1760 2120,-1760 280,-1750 400,-1750 820,-1750 940,-1730 1460,-1730 1580,-1730 2000,-1730 2120,-1730 280,-1720 400,-1720 820,-1720 280,-1690 320,-1690 360,-1690 400,-1690 820,-1690 860,-1690 900,-1690 940,-1690 1460,-1690 1500,-1690 1540,-1690 1580,-1690 2000,-1690 2040,-1690 2080,-1690 2120,-1690
  other v4: 1544,-3384 2185,-3220 640,-3170 2231.27,-3159.06 2110,-2970 1330,-2930 735,-2925 2260,-2330 2330,-2220 240,-2095 780,-2095 1455,-2095 1985,-2095 2440,-1990 2625,-1940
  other v9: 3165,-1850 3200,-1850 3235,-1850 3165,-1800 3200,-1800 3235,-1800
  other v13: 0,-3700.79 3307.09,-3700.79 0,0 3307.09,0
  other v15: 1140,-1240
DOG: U1.6 U2.10 | length 701.9
  Top Layer w10: U2.10@2040,-3322 2068,-3322 2077,-3331 2077,-3415 2092,-3430 2565,-3430 2577,-3418 U1.6@2577,-3352
DR-A: U2.30 U3.13 U5.13 | length 1655.7
  Top Layer w10: U3.13@155,-3217 155,-3284 168,-3297 728,-3297 734.26,-3290.74 U2.30@1679.68,-3290.74
  Top Layer w12: 732,-3289 U5.13@732,-3233
DR-B: U2.31 U3.5 U5.5 | length 1460.3
  Top Layer w10: U3.5@305,-3360 305,-3333 316.26,-3321.74 U2.31 ; U5.5@879,-3375 879,-3323
FAN: R5.1 U2.11 | length 1256.6
  Top Layer w10: U2.11@2047,-3291 2108,-3291 2137,-3320 2205,-3320 2251,-3366 2438,-3366 2455,-3349 2455,-3281 2475,-3261 2830,-3261 2847,-3278 2847,-3534 2862,-3549 R5.1
MISO: D4.1 P5.3 U2.16 | length 279
  Top Layer w10: U2.16@2033,-3132 2137,-3132 2219,-3214 D4.1@2278,-3214
MOSI: D3.1 P5.2 Q37.1 U2.15 | length 1033
  Top Layer w10: U2.15@2043,-3164 2067,-3164 2166,-3263 P5.2@2172,-3263 ; P5.2@2169,-3280 P5.2@2176,-3280 ; P5.2@2172,-3272 2193,-3272 2241,-3320 D3.1@2275,-3320 ; v7@2288,-2991 2288,-2783 2371,-2700 Q37.1@2371,-2675
  Bottom Layer w10: P5.2@2173,-3269 2268,-3269 2289,-3248 v7@2289,-2990
  other v7: 2288,-2992
NetC2_1: C2.1 U2.7 Y1.2 | length 460.2
  Top Layer w10: Y1.2@1753,-3594 1859,-3594 1927.74,-3525.26 U2.7 ; C2.1@1823,-3737 1823,-3595
NetC3_1: C3.1 U2.8 Y1.1 | length 345.6
  Top Layer w10: C3.1@1885,-3735 1885,-3653 Y1.1@1945,-3593 ; Y1.1@1959.24,-3579.76 1959.24,-3455 1959.87,-3410.33 U2.8@1960,-3401
NetC5_1: C5.1 U2.20 | length 67
  Top Layer w10: U2.20@1863,-3060 C5.1@1863,-2993
NetC9_1: C9.1 D8.2 Q7.1 Q18.1 R13.2 | length 2452.6
  Top Layer w12: v6@1223,-2195 R13.2@1306,-2195 ; C9.1@1289,-2437 1289,-2365 1312,-2342 R13.2@1312,-2193
  Top Layer w15: D8.2@1317,-2724 1160,-2724 1152,-2716 1152,-1455 1179,-1428 1179,-1092 1189,-1082 1301,-1082 1320,-1063 Q7.1@1320,-978
  Top Layer w18: Q7.1@1319.01,-956.55 Q7.1@1319,-956
  Bottom Layer w15: v6(1152,-2194) v6@1226,-2194
  other v6: 1227,-2194
NetC9_2: C9.2 D8.1 P6.2 Q7.3 Q18.3 Q25.2 R21.1 | length 1533.4
  Top Layer w10: R21.1@1298,-2489 C9.2@1348.24,-2438.76
  Top Layer w12: D8.1@1295,-2607.76 R21.1@1295,-2495 ; C9.2@1351,-2431 Q18.3@1351,-2339
  Top Layer w15: R21.1@1286,-2491 1216,-2491 1196,-2471 1196,-1504 Q25.2@1332,-1368
  other v2: 1300,-1400 1360,-1400 1420,-1400 1480,-1400 1540,-1400 1300,-1340 1360,-1340 1420,-1340 1480,-1340 1540,-1340 1300,-1280 1360,-1280 1420,-1280 1480,-1280 1540,-1280 1300,-1220 1360,-1220 1420,-1220 1480,-1220 1540,-1220
NetC10_1: C10.1 D11.2 Q8.1 Q11.1 R14.1 | length 2283
  Top Layer w15: v6@1794,-2193 R14.1@1841,-2193 ; D11.2@1820,-2700 1762,-2700 1727,-2665 1727,-1999 1711,-1983 1711,-1108 1734,-1085 1838,-1085 1858,-1065 Q8.1@1858,-966 ; C10.1@1826,-2431 1826,-2335 1843,-2318 R14.1@1843,-2200
  Bottom Layer w15: v6@1728,-2193 v6@1791,-2193
  other v6: 1727,-2193 1793,-2193
NetC10_2: C10.2 D11.1 P6.1 Q8.3 Q11.3 Q27.2 R22.1 | length 1369.8
  Top Layer w12: D11.1@1815,-2621 R22.1@1815,-2496 ; R22.1@1840,-2490 C10.2@1887,-2443 ; C10.2@1885,-2432 Q11.3@1885,-2360
  Top Layer w15: Q27.2@1763,-1447.46 1762,-1448.46 1762,-2483 1775,-2496 R22.1@1827,-2496
  other v2: 1840,-1400 1900,-1400 1960,-1400 2020,-1400 2080,-1400 1840,-1340 1900,-1340 1960,-1340 2020,-1340 2080,-1340 1840,-1280 1900,-1280 1960,-1280 2020,-1280 2080,-1280 1840,-1220 1900,-1220 1960,-1220 2020,-1220 2080,-1220
NetC11_1: C11.1 D12.2 Q12.1 Q19.1 R15.2 | length 2361.5
  Top Layer w15: v6@70,-2195 R15.2@107,-2195 ; C11.1@77,-2435 77,-2327 103,-2301 R15.2@103,-2205 ; D12.2@96,-2721 -7,-2721 -21,-2707 -21,-1060 2,-1037 130,-1037 143,-1024 Q12.1@143,-979
  Bottom Layer w15: v6(-22,-2195) v6@68,-2195
  other v6: 69,-2195
NetC11_2: C11.2 D12.1 P7.2 Q12.3 Q19.3 Q29.2 R25.1 | length 1390.6
  Top Layer w12: D12.1@88,-2624 88,-2490 140,-2438 Q19.3@140,-2358
  Top Layer w15: Q29.2@61,-1458 21,-1498 21,-2482 33,-2494 R25.1@74,-2494 ; Q12.3@339,-952 Q12.3@339.08,-956.55
  other v2: 120,-1400 180,-1400 240,-1400 300,-1400 360,-1400 120,-1340 180,-1340 240,-1340 300,-1340 360,-1340 120,-1280 180,-1280 240,-1280 300,-1280 360,-1280 120,-1220 180,-1220 240,-1220 300,-1220 360,-1220
NetC12_1: C12.1 D13.2 Q13.1 Q16.1 R16.1 | length 2418.6
  Top Layer w12: C12.1@617,-2436 617,-2338 642.59,-2312.41 R16.1@642.59,-2197.64
  Top Layer w15: v6@586,-2191.59 R16.1@639.36,-2191.59 ; D13.2@642,-2721 518,-2721 512,-2715 512,-1055 528,-1039 670,-1039 680,-1029 Q13.1@680,-958
  Bottom Layer w15: v6@514,-2192 v6@588,-2192
  other v6: 513,-2193 587,-2192
NetC12_2: C12.2 D13.1 P7.1 Q13.3 Q16.3 Q32.2 R26.1 | length 1330.2
  Top Layer w12: R26.1@621,-2496 681,-2436 Q16.3@681,-2353 ; D13.1@625.41,-2583.36 R26.1@625.41,-2509.82
  Top Layer w15: Q32.2@594,-1466 555,-1505 555,-2473 576,-2494 R26.1@612,-2494
  other v2: 660,-1400 720,-1400 780,-1400 840,-1400 900,-1400 660,-1340 720,-1340 780,-1340 840,-1340 900,-1340 660,-1280 720,-1280 780,-1280 840,-1280 900,-1280 660,-1220 720,-1220 780,-1220 840,-1220 900,-1220
NetC15_1: C15.1 Q25.1 Q33.3 R34.2 | length 397.2
  Top Layer w15: R34.2@1317,-2147 1317,-2036 1328,-2025 Q33.3@1345,-2025 ; Q25.1@1322,-1786 1322,-1828 1350,-1856 Q33.3@1350,-2028
NetC16_1: C16.1 Q27.1 Q30.3 R33.1 | length 396.6
  Top Layer w15: R33.1@1844,-2149 1844,-2041 1852,-2033 Q30.3@1880,-2033 ; Q27.1@1860,-1778 1860,-1838 1880,-1858 Q30.3@1880,-2019
NetC17_1: C17.1 Q29.1 Q35.3 R38.2 | length 407.8
  Top Layer w15: R38.2@104.76,-2149.76 104.76,-2030.24 110,-2025 Q35.3@130,-2025 ; Q35.3@140,-2019 Q29.1@140,-1759.54
  Top Layer w20: Q35.3@139,-2025 Q35.3@139.05,-2023.61
NetC18_1: C18.1 Q32.1 Q34.3 R35.1 | length 383.6
  Top Layer w15: R35.1@637.76,-2143 637.76,-2038.24 644,-2032 668,-2032 ; Q34.3@680,-2018 Q32.1@680,-1772
NetC19_1: C19.1 D14.2 D15.1 | length 187.5
  Top Layer w15: D15.1@2771,-2735 D14.2@2855,-2735 ; D14.2@2865,-2742 2900,-2777 C19.1@2900,-2831
NetC19_2: C19.2 Q36.1 Q38.1 | length 228
  Top Layer w12: Q36.1@2602,-2807 C19.2@2700,-2807 ; Q36.1@2603,-2793 Q38.1@2603,-2663
NetC27_2: C27.2 R48.1 U6.3 | length 158
  Top Layer w15: C27.2@2270,-2134 U6.3@2349,-2134 ; C27.2@2271,-2150 R48.1@2271,-2071
NetC33_1: C33.1 D16.2 L9.1 U7.8 | length 66
  Top Layer w12: L9.1@2970,-1861 C33.1@3036,-1861
NetC33_2: C33.2 U7.1 | length 66
  Top Layer w12: C33.2@3048,-1930 U7.1@3114,-1930
NetC36_1: C36.1 R51.1 R52.2 U6.5 | length 528
  Top Layer w12: R52.2@2437.4,-1885 R51.1@2502,-1885 ; R51.1@2502,-1886.4 2502,-1984 2511,-1993 2618,-1993 2641,-2016 2641,-2174 2630,-2185 U6.5@2590,-2185
NetD1_1: D1.1 LS1.1 Q1.3 | length 401.6
  Top Layer w10: Q1.3@2217.1,-3700.47 Q1.3@2218,-3697
  Top Layer w20: Q1.3@2214,-3696 LS1.1@2612,-3696
NetD2_1: D2.1 P4.2 Q3.3 | length 429
  Top Layer w30: Q3.3@3091,-3505 D2.1@3091,-3076
NetD3_2: D3.2 R6.1 | length 66
  Top Layer w12: D3.2@2354,-3328 R6.1@2354,-3262
NetD4_2: D4.2 R7.1 | length 66
  Top Layer w12: D4.2@2355,-3224 R7.1@2355,-3158
NetD5_2: D5.2 R8.1 | length 66
  Top Layer w12: D5.2@2353,-3110 R8.1@2353,-3044
NetD6_1: D6.1 Q4.3 Q18.2 R21.2 | length 446.7
  Top Layer w12: R21.2@1356,-2485 1399,-2485 1446.5,-2437.5 ; Q18.2@1391,-2260 1391,-2382 1443,-2434 ; 1444,-2436 Q4.3@1449,-2436
  Top Layer w15: 1447,-2437.76 D6.1@1583,-2437.76
NetD6_2: D6.2 R13.1 | length 631.4
  Top Layer w12: R13.1@1383,-2195 1415,-2195 1427,-2207 1427,-2359 1459,-2391 1645,-2391 1662,-2408 1662,-2543 1652,-2553 D6.2@1626,-2553
NetD7_1: D7.1 Q6.3 Q11.2 R22.2 | length 459.1
  Top Layer w12: Q11.2@1918,-2263.18 1918,-2385 1973,-2440
  Top Layer w15: R22.2@1893,-2490.76 1919.24,-2490.76 1967.5,-2442.5 ; 1973,-2440 Q6.3@1990,-2440 ; Q6.3@1983,-2440.76 D7.1@2131,-2440.76
NetD7_2: D7.2 R14.2 | length 610.1
  Top Layer w12: R14.2@1924,-2196 1946,-2196 1961,-2211 1961,-2357 1997,-2393 2172,-2393 2190,-2411 2190,-2538 2179,-2549 D7.2@2152,-2549
NetD9_1: D9.1 Q5.3 Q19.2 R25.2 | length 463.2
  Top Layer w12: Q19.2@179.24,-2247 179.24,-2384.24 231,-2436
  Top Layer w15: R25.2@140,-2487 181,-2487 231.24,-2436.76 D9.1@372,-2436.76
NetD9_2: D9.2 R15.1 | length 625.3
  Top Layer w12: R15.1@177,-2195 205,-2195 218,-2208 218,-2365 244,-2391 439,-2391 450,-2402 450,-2536 439,-2547 D9.2@414,-2547
NetD10_1: D10.1 Q10.3 Q16.2 R26.2 | length 472.1
  Top Layer w12: Q16.2@720,-2247 720,-2381 774,-2435
  Top Layer w15: R26.2@680,-2499 687,-2492 717,-2492 772.24,-2436.76 ; 771.24,-2437.76 D10.1@915,-2437.76
NetD10_2: D10.2 R16.2 | length 636.8
  Top Layer w12: R16.2@711,-2196 R16.2@714.03,-2195.9 ; R16.2@728,-2195 748,-2195 759,-2206 759,-2358 791,-2390 985,-2390 996,-2401 996,-2542 983,-2555 D10.2@951,-2555
NetL1_1: L1.1 U2.24 | length 95.6
  Top Layer w12: L1.1@1702,-2992 1702,-3047 1713,-3058 U2.24@1738,-3058
NetL2_1: L2.1 U2.23 | length 67
  Top Layer w10: U2.23@1770,-3057 L2.1@1770,-2990
NetL3_1: L3.1 U2.25 | length 148.9
  Top Layer w10: L3.1@1531,-3113 1572,-3113 1591,-3132 U2.25@1672,-3132
NetL4_1: L4.1 U2.26 | length 234.2
  Top Layer w10: L4.1@1478,-3122 1478,-3151 1493,-3166 U2.26@1677,-3166
NetL5_2: L5.2 U2.32 | length 470.3
  Top Layer w10: L5.2@1266,-3429 1266,-3370 1282.76,-3353.24 U2.32@1666,-3353.24 ; U2.32@1681.62,-3354.84 U2.32@1686,-3355
NetL6_2: L6.2 U2.1 | length 271
  Top Layer w10: L6.2@1466,-3417 U2.1@1737,-3417
NetL7_1: L7.1 U2.18 | length 67
  Top Layer w10: U2.18@1928,-3061 L7.1@1928,-2994
NetQ1_2: Q1.2 R2.1 | length 45.8
  Top Layer w15: Q1.2@2247.76,-3599.76 R2.1@2247.76,-3554
NetQ3_2: Q3.2 R5.2 | length 89.6
  Top Layer w12: R5.2@2909,-3479 Q3.2@2998.6,-3479
NetQ4_2: Q4.2 Q14.3 R9.2 | length 165
  Top Layer w15: Q14.3@1423,-2686 Q4.2@1423,-2521
NetQ5_2: Q5.2 Q17.3 R11.2 | length 160
  Top Layer w15: Q17.3@213,-2687 Q5.2@213,-2527
NetQ6_2: Q6.2 Q9.3 R10.2 | length 164.9
  Top Layer w12: R10.2@1970,-2606 1994,-2630 Q9.3@1994,-2689
  Top Layer w15: R10.2@1953,-2592 Q6.2@1953,-2520
NetQ9_1: Q9.1 R24.1 | length 60
  Top Layer w15: Q9.1@2093,-2654 R24.1@2153,-2654
NetQ9_2: Q9.2 R18.1 | length 138
  Top Layer w15: R18.1@1945,-2727 Q9.2@2083,-2727
NetQ10_2: Q10.2 Q15.3 R12.2 | length 167
  Top Layer w15: Q15.3@753,-2686 Q10.2@753,-2519
NetQ14_1: Q14.1 R23.2 | length 78
  Top Layer w12: Q14.1@1505,-2653 R23.2@1583,-2653
NetQ14_2: Q14.2 R17.1 | length 60
  Top Layer w15: R17.1@1514,-2792 Q14.2@1514,-2732
NetQ15_1: Q15.1 R28.1 | length 60
  Top Layer w15: Q15.1@838,-2651 R28.1@898,-2651
NetQ15_2: Q15.2 R20.1 | length 60
  Top Layer w15: R20.1@834,-2790 Q15.2@834,-2730
NetQ17_1: Q17.1 R27.2 | length 60
  Top Layer w15: Q17.1@296,-2652 R27.2@356,-2652
NetQ17_2: Q17.2 R19.1 | length 60
  Top Layer w15: R19.1@294,-2789 Q17.2@294,-2729
NetQ20_2: Q20.2 Q26.3 R29.2 | length 154.1
  Top Layer w12: Q26.3@1556,-2136 1581,-2136 1589,-2144 Q20.2@1589,-2261.76
NetQ20_3: Q20.3 R34.1 | length 352.6
  Top Layer w12: R34.1@1381,-2143 1450,-2143 1463,-2156 1463,-2332 1478,-2347 Q20.3@1546,-2347
NetQ21_2: Q21.2 Q22.3 R30.2 | length 153.9
  Top Layer w12: Q22.3@2084,-2143 2108,-2143 2118,-2153 Q21.2@2118,-2268.76
NetQ21_3: Q21.3 R33.2 | length 352.7
  Top Layer w12: R33.2@1913,-2139.24 1980.24,-2139.24 1993,-2152 1993,-2329 2011,-2347 Q21.3@2076,-2347
NetQ22_1: Q22.1 R37.1 | length 45.8
  Top Layer w15: Q22.1@2043,-2041.76 R37.1@2043,-1996
NetQ23_2: Q23.2 Q31.3 R31.2 | length 152.2
  Top Layer w12: Q31.3@339,-2145 362,-2145 367.24,-2150.24 Q23.2@367.24,-2272
NetQ23_3: Q23.3 R38.1 | length 335.9
  Top Layer w12: R38.1 238,-2140 247,-2149 247,-2327 262,-2342 Q23.3@322,-2342
NetQ24_2: Q24.2 Q28.3 R32.2 | length 153
  Top Layer w12: Q28.3@873,-2139 897,-2139 906,-2148 Q24.2@906,-2264.24
NetQ24_3: Q24.3 R35.2 | length 337.4
  Top Layer w12: R35.2@710,-2140 774,-2140 787,-2153 787,-2331 804,-2348 857,-2348
NetQ26_1: Q26.1 R36.2 | length 45.8
  Top Layer w15: Q26.1@1512,-2033 R36.2@1512,-1987.24
NetQ28_1: Q28.1 R40.1 | length 45.8
  Top Layer w15: Q28.1@832,-2036.76 R40.1@832,-1991
NetQ30_2: Q30.2 R42.2 | length 128
  Top Layer w15: Q30.2@1917,-1934 R42.2@2045,-1934
NetQ31_1: Q31.1 R39.2 | length 45.8
  Top Layer w15: Q31.1@293.24,-2032 R39.2@293.24,-1986.24
NetQ33_2: Q33.2 R41.1 | length 128
  Top Layer w15: Q33.2@1387,-1930 R41.1@1515,-1930
NetQ34_2: Q34.2 R44.2 | length 97
  Top Layer w15: Q34.2@717,-1927 814,-1927
NetQ35_2: Q35.2 R43.1 | length 128
  Top Layer w15: Q35.2@176,-1930 R43.1@304,-1930
NetQ36_2: Q36.2 Q37.3 Q38.2 R45.1 | length 347.9
  Top Layer w12: R45.1@2378,-2804.6 2378,-2742 2386,-2734 Q37.3@2409,-2734 ; Q37.3@2415,-2734 2522,-2734 ; Q36.2@2524,-2797 Q38.2@2524,-2653
NetQ37_2: Q37.2 R46.1 | length 46
  Top Layer w12: 2447,-2638 R46.1@2447,-2592
NetR1_1: R1.1 U1.4 | length 96.6
  Top Layer w15: U1.4 R1.1@2525,-3045
NetR48_2: R48.2 U4.5 | length 566.8
  Top Layer w15: R48.2@2270,-2016 2270,-1561 2296,-1535 U4.5@2371,-1535
NetR49_2: R49.2 R50.2 U7.4 | length 120
  Top Layer w12: U7.4@3285,-1910 R50.2@3351,-1910 ; 3351,-1879 R49.2@3351,-1825
NetU1_1: U1.1 U1.8 | length 185.4
  Top Layer w12: U1.8@2675,-3327 v7(2675,-3297) ; v7(2675,-3188) U1.1
  Bottom Layer w12: v7(2675,-3297) v7(2675,-3188)
NetU3_1: U3.1 U5.6 | length 1031.9
  Top Layer w10: U3.1 105,-3502 134,-3531 906,-3531 931,-3506 U5.6@931,-3428
NetU3_9: U3.9 U5.12 | length 526.8
  Top Layer w10: U3.9@354.01,-3203.56 U3.9@354,-3203 ; U3.9@354,-3193 U3.9@354.16,-3203.56 ; U3.9@355,-3238 355,-3263 366,-3274 v7(703,-3274)
  Top Layer w12: v7@780,-3264 U5.12@780,-3208
  Bottom Layer w10: v7(703,-3274) 770,-3274 780,-3264 v7(780,-3265)
PWM-A: U2.14 U3.10 U3.12 | length 2053.4
  Top Layer w10: U3.12@204,-3237 204,-3266 210,-3272 298,-3272 305,-3265 305,-3106 325,-3086 1338,-3086 v5@1450,-3198 ; v5@1961.24,-3195.76 U2.14@2007,-3195.76
  Top Layer w15: U3.12@204,-3199 U3.12@204.08,-3203.56
  Bottom Layer w10: v5(1451,-3197) v5(1960,-3197)
PWM-B: U2.13 U3.2 U3.4 | length 2143.6
  Top Layer w10: v5@1950.24,-3228.76 U2.13@1996,-3228.76
  Top Layer w12: U3.2@154.09,-3396.47 155.55,-3485.55 174,-3504 v5@880,-3504 ; 253.76,-3503 U3.4@253.76,-3417
  Top Layer w15: U3.2@154,-3391 U3.2@154.09,-3396.47
  Bottom Layer w12: v5@881,-3506 1029,-3506 1307,-3228 v5(1951,-3228)
  other v5: 882,-3504
RST: P5.1 U1.7 U2.29 | length 1086.5
  Top Layer w10: U2.29@1694,-3259.24 v5@1736,-3259.24 ; P5.1@2183,-3385 2189,-3391 2457,-3391 2479,-3369 2479,-3295 2488,-3286 2614,-3286 2625,-3297 U1.7@2625,-3323
  Top Layer w12: U1.7@2626.69,-3346.29 U1.7@2627,-3354
  Bottom Layer w10: v5@1734,-3259 2059,-3259 P5.1@2165,-3365
  other v5: 1736,-3259
S1: L5.1 P1.1 R53.1 | length 121
  Top Layer w12: P1.1@1275,-3589 L5.1@1275,-3506 ; L5.1@1278,-3495 R53.1@1316,-3495
S2: L6.1 P2.1 R54.1 | length 261.9
  Top Layer w12: P2.1@1289,-3681 1342,-3628 1342,-3554 R54.1@1395,-3501 ; R54.1@1413,-3495 L6.1@1451,-3495
SCK: D5.1 P5.4 U2.17 | length 328.7
  Top Layer w10: U2.17@1964,-3069 2177,-3069 2210,-3102 D5.1@2279,-3102
TEMP: C1.2 R3.1 RT1.2 U2.28 | length 2616.4
  Top Layer w12: v5(1077,-3198) 1106,-3227 U2.28@1659,-3227 ; v5(1077,-2971) 1077,-1215 RT1.2@1104.13,-1187.87
  Bottom Layer w12: v5@1077,-3199 v5(1077,-2971)
VCC: C22.2 C23.1 C24.1 C25.1 D14.1 P8.1 R47.2 R51.2 U4.1 U4.2 U7.7 | length 2014.4
  Top Layer w20: R51.2@2565,-1885 2650,-1885 2675,-1910 2675,-2375 2835,-2535 D14.1@2835,-2605 ; R51.2@2567,-1882 C25.1@2567,-1793 ; C25.1@2570,-1785 2630,-1785 2655,-1760 2655,-1335 ; U4.2@2590,-1635 2650,-1635
  Top Layer w40: U7.7 3175,-1665
  Top Layer w80: 2985,-1315 2985,-1405 3175,-1595 3175,-1645
VH: C20.2 D15.2 Q4.1 Q5.1 Q6.1 Q10.1 R9.1 R10.1 R11.1 R12.1 | length 2818.9
  Top Layer w15: R11.1@281,-2590 v12(319,-2590) ; R11.1@288,-2576 Q5.1@288,-2538 ; R12.1@818,-2590 v12(856,-2590) ; R12.1@828,-2575 Q10.1@828,-2537 ; R9.1@1487,-2590 v12@1525,-2590 ; R9.1@1498,-2577 Q4.1@1498,-2539 ; R10.1@2026,-2577 Q6.1@2026,-2539 ; R10.1@2029,-2590 v12@2057,-2590
  Top Layer w25: C20.2@2700,-2530 C20.2@2705,-2530
  Top Layer w35: C20.2@2705,-2530 2750,-2575 D15.2@2750,-2625
  Bottom Layer w20: v12@321,-2590 2630,-2590 C20.2@2691,-2529
  Bottom Layer w25: C20.2@2691,-2529 C20.2@2702,-2529
  other v12: 1526,-2590 2059,-2590
VP: C13.1 C14.1 Q7.2 Q8.2 Q12.2 Q13.2 R47.1 U4.8 | length 1216.5
  Top Layer w18: 2335,-624 2300,-659 2300,-1400 2330,-1430 C14.1@2434.88,-1430 ; U4.8@2375,-1685 2420,-1685 2441,-1664 C14.1@2441,-1460
VSA: C35.2 D17.1 D18.2 U2.19 U6.6 U6.7 | length 1635.8
  Top Layer w10: U2.19@1897,-3052 1897,-2894 1911,-2880 2231,-2880 2264,-2847 2264,-2508 2290,-2482 2478,-2482 2496,-2464 D18.2@2496,-2398.94 ; D18.2@2497,-2402.39 2497.51,-2397.14 D18.2@2498,-2392
  Top Layer w12: D17.1@2511,-2290 C35.2@2575.6,-2290
  Top Layer w15: D18.2@2497,-2392 2497,-2153 2515,-2135 U6.6@2557,-2135 ; U6.6@2572,-2136 U6.7@2572,-2080.4
pads on no net: U1.5 U2.2 U2.12 U2.27 U4.3 U4.6 U4.7 U5.1 U5.2 U5.3 U5.4 U5.8 U5.9 U5.10 U5.11 U7.2 U7.3 U7.5

## Polygon pours and split planes (outlines as drawn)
DGND on Top Layer "Top Layer-No Net" (solid, remove dead copper, pour order 1000): -334.17,162.2 -317.17,179.2 3480.83,179.2 3480.83,-1830.8 1650.83,-1830.8 -219.17,-1830.8 -279.17,-1770.8
DGND on Top Layer "Top Layer-No Net" (solid, remove dead copper, pour order 1001): -210,-1810 3480,-1810 3490,-1820 3510,-1840 3510,-4060 -170,-4060 -310,-3920
DGND on Top Layer "Top Layer-No Net" (solid, remove dead copper, pour order 1002): 355,-2685 1725,-2685 1725,-3130 1745,-3150 1685,-3090 360,-3090
NetC11_2 on Bottom Layer "Top Layer-No Net" (solid, remove dead copper, pour order 1003): 201.18,0 460,0 460,-1440 60,-1440 60,-370.91 177.65,-261.82 201.18,-240 201.18,0
NetC9_2 on Bottom Layer "Top Layer-No Net" (solid, remove dead copper, pour order 1004): 1381.18,0 1640,0 1640,-1440 1240,-1440 1240,-370.91 1357.65,-261.82 1381.18,-240 1381.18,0
NetC12_2 on Bottom Layer "Top Layer-No Net" (solid, remove dead copper, pour order 1005): 540,0 540,-1440 960,-1440 960,-1160 960,-340 849.47,-240 827.37,-220 827.37,0
NetC10_2 on Bottom Layer "Top Layer-No Net" (solid, remove dead copper, pour order 1006): 1740,0 1740,-1440 2160,-1440 2160,-1160 2160,-340 2049.47,-240 2027.37,-220 2027.37,0
DGND on Bottom Layer "Top Layer-No Net" (solid, remove dead copper, pour order 1007): -200,140 -190,150 3450,150 3450,-1830 3440,-1820 -290,-1820
DGND on Bottom Layer "Top Layer-No Net" (solid, remove dead copper, pour order 1008): -250,-1680 3580,-1680 3580,-4470 3470,-4580 2990,-4100 -330,-4100

## Keep-outs
Keep-Out Layer:
  lines w6: -125,-3776 ccw(c-97.5,-3773.5) -95,-3801 3403,-3801 ccw(c3400.5,-3773.5) 3428,-3771 ; -125,-3775 -125,89 cw(c-97.5,91.5) -100,119 3398,119 cw(c3400.5,91.5) 3428,94 3428,-3772

## Other copper
Top Layer:
  rectangle net VCC: 2380,-1347 3028,-946
  rectangle net VCC: 2555,-1690 2580,-1640
  rectangle net NetC33_1: 2890,-2070 2985,-1685
  rectangle net NetC33_1: 3065,-1755 3140,-1685
  rectangle net NetC33_1: 2935,-1785 3080,-1685
  rectangle net +5V: 3264,-2548 3354,-2359
  rectangle net +12V: 2996,-2477 3175,-2365
  rectangle net +12V: 2943,-2476 3060,-2115
  rectangle net +12V: 2713,-2238 2969,-2115
  rectangle net +12V: 2713,-2223 2839,-1828
  rectangle net VP: 38,-676 2520,-369
  rectangle net VCC: 2673,-1346 3002,3
  rectangle net NetC11_2: 245,-1190 435,-900
  rectangle net NetC12_2: 780,-1190 970,-900
  rectangle net NetC9_2: 1420,-1190 1610,-900
  rectangle net NetC10_2: 1955,-1190 2145,-900
  rectangle net DGND: 3090,-2305 3370,-2040
Bottom Layer:
  rectangle net NetC11_2: 60,-1440 420,-1180
  rectangle net NetC12_2: 600,-1440 960,-1180
  rectangle net NetC9_2: 1240,-1440 1600,-1180
  rectangle net NetC10_2: 1780,-1440 2140,-1180

## Silkscreen, mask and mechanical layers (free items; w line width, h text height)
Top Overlay:
  lines w10: 235,-185 ccw(c267.5,-187.5) 270,-220 ; 235,-15 cw(c267.5,-12.5) 270,20 ; 740,-220 ccw(c742.5,-187.5) 775,-185 ; 740,20 cw(c742.5,-12.5) 775,-15 ; 1415,-190 ccw(c1447.5,-192.5) 1450,-225 ; 1415,-20 cw(c1447.5,-17.5) 1450,15 ; 1920,-225 ccw(c1922.5,-192.5) 1955,-190 ; 1920,15 cw(c1922.5,-17.5) 1955,-20 ; 2370,-185 ccw(c2402.5,-187.5) 2405,-220 ; 2370,-15 cw(c2402.5,-12.5) 2405,20 ; 2875,-220 ccw(c2877.5,-187.5) 2910,-185 ; 2875,20 cw(c2877.5,-12.5) 2910,-15
  text "PW" at 2590,40 h60
  text "MB" at 810,-150 h80
  text "MA" at 1990,-160 h80
  text "+" at 2950,-160 h100
  text "CK" at 2100,-3105 h60 r90
  text "IN" at 2100,-3195 h60 r90
  text "O" at 2070,-3285 h60
  text "RS" at 2100,-3405 h60 r90
  text "V1.0" at -45,-3580 h80 r90
  text "2017/06/29" at 555,-3770 h60
  text "Lovenix" at 855,-3770 h60
  text "S" at 1275,-3790 h40
  text "+" at 1365,-3795 h60
  text "-" at 1470,-3795 h60
Top Solder:
  rectangle: 1950,-1160 2145,-900
  rectangle: 1420,-1250 1620,-900
  rectangle: 780,-1210 980,-900
  rectangle: 240,-1170 440,-900
  rectangle: 260,-1840 420,-1670
  rectangle: 800,-1840 960,-1670
  rectangle: 1440,-1840 1600,-1670
  rectangle: 1980,-1850 2140,-1670
  lines w40: 330,-540 ccw(c378.28,-491.72) 378.28,-560
  lines w50: 2445,-1160 2671.01,-1160 ccw(c2671.01,-1041.72) 2754.64,-1125.36 ccw(c2669.29,-1040) 2790,-1040 2790,-110
  lines w80: 378.28,-560 2445,-560

## Text inside footprints (layer, text, board x,y; h text height)
LS1: Top Overlay "+" at 2706,-3473 h60 r180